# Altium PCB ControlUnit.PcbDoc (part 2 of 2)
Units mm, origin at the board's own origin, x right, y up, seen from the top; angles counter-clockwise.
Board outline 168.75 x 59.75 mm, 4 copper layers (Top Layer, GND, VCC, Bottom Layer), stack 1.536 mm thick; 143 components, 128 nets, 538 pads, 141 vias.
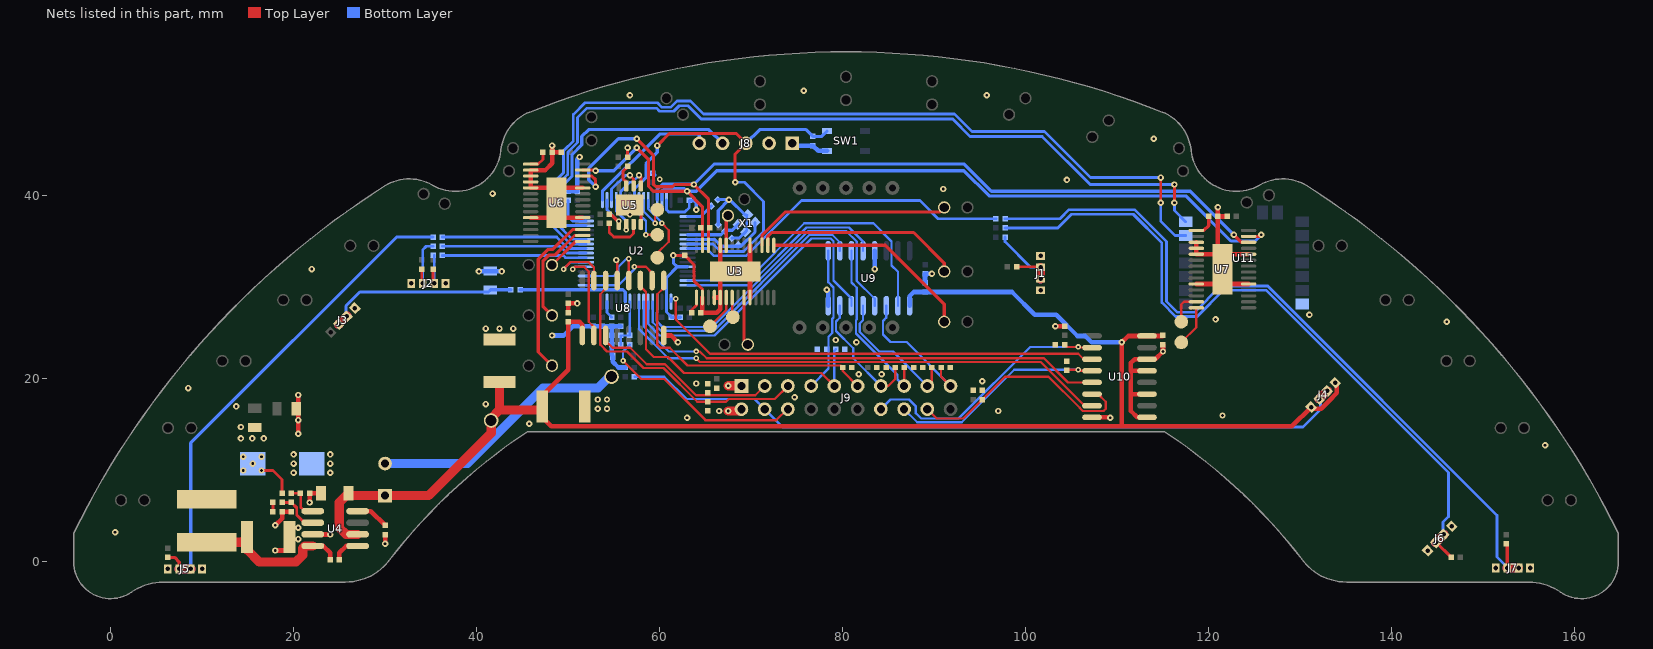
[diagram p4: the nets of this part, all layers, seen from the top]

## Via types
v1: diameter 0.7, hole 0.3, Top Layer to Bottom Layer, tented both sides, 122 vias
v2: diameter 0.6, hole 0.25, Top Layer to Bottom Layer, tented both sides, 18 vias
v3: diameter 0.7, hole 0.3, Top Layer to Bottom Layer, tented bottom, 1 vias

## Nets (pads, with @x,y where several pads share a name; then routed paths per layer and width w, separated by ;. In a path a pad name is that pad's centre, name@x,y a point inside that pad or via, vN(x,y) a via of type N, cw(c..) or ccw(c..) an arc to the next point about the centre after c; other vN are vias at no path point) (continued)
GND: C1.2 C2.2 C4.2 C6.2 C7.1 C8.2 C9.1 C10.1 C11.1 C12.1 C13.2 C14.2 C15.2 C16.2 C17.2 C18.2 C19.2 C20.2 C21.2 C22.2 C23.2 C24.2 C25.2 C26.1 C27.2 C28.1 C29.2 C30.2 C31.1 C32.2 D9.1 D10.1 D34.1 J1.1 J1.4 J2.1 J2.4 J3.1 J5.1 J5.4 J6.1 J6.4 J7.1 J7.4 J8.1 J9.2 R4.1 R5.2 R8.1 R10.2 R11.2 R13.1 R19.1 R20.1 R30.2 R31.1 R32.1 R33.1 R34.1 R35.1 R36.1 R37.1 R38.1 R39.1 R40.1 R41.1 R42.1 R43.1 R44.1 R45.1 SW1.4 U2.12 U2.18 U2.63 U3.2 U3.4 U3.5 U3.10 U3.19 U3.24 U4.7 U5.4 U5.9 U6.2 U6.3 U6.4 U6.5 U6.10 U6.19 U6.24 U7.3 U7.4 U7.5 U7.10 U7.19 U7.24 U8.8 U8.13 U9.8 U9.13 U10.8 U10.9 U10.11 U10.13 U10.14 U11.7 X1.2 X1.4 | length 204
  Top Layer w0.3: U8.13@55.365,30.75 v1@55.365,32.885
  Top Layer w0.35: v1(55.25,33) v1@55.365,32.885 ; C14.2@56.5,44.25 v1(56.5,45.25) ; U5.9@56.75,39 57.75,39 57.95,38.8 U5.4@57.95,36.9 ; v1(61.5,33.5) C2.2@62.75,33.5 63.75,32.5 63.75,30.75 64.675,29.825 U3.2@64.675,28.9
  Top Layer w0.5: v1(18,1.25) 19.25,1.25 19.57,1.57 D9.1@19.57,2.07 ; v1(18,4) 18.75,4.75 R11.2@18.75,5.5 C6.2@19.75,5.5 ; v1(20.5,14) v1(20.5,15.5) v1(20.5,18.25) ; v1(21.75,6.5) R13.1@21.75,7.5 C7.1@23,7.5 ; U4.7@22.12,3 v1(24,3) ; v1(30,2) C8.2@30,3 ; U6.10@45.9,37.625 U6.10@48.875,37.625 ; v1(48.25,45.5) R19.1@48.25,44.75 ; U6.10@49,40.875 U6.5@45.9,40.875 U6.4@45.9,41.525 U6.3@45.9,42.175 U6.2@45.9,42.825 47.525,42.825 48.25,43.55 R19.1@48.25,44.75 ; C23.2@49.25,44.75 R19.1@48.25,44.75 ; C26.1@50,27.25 C27.2@50,28.25 v1(51,28.25) ; U6.19@51.6,37.625 U6.10@48.875,37.625 ; U6.24@51.6,40.875 48.75,40.875 U6.10@48.75,39.25 48.75,37.75 U6.10@48.875,37.625 ; U8.8@60.445,24.75 61.25,24.75 v1(62,24) ; U3.2@64.675,28.9 64.675,27.425 R8.1@64.5,27.25 66.25,27.25 66.625,27.625 U3.5@66.625,28.9 ; U3.4@65.975,28.9 U3.5@66.625,28.9 ; U3.10@66.25,31.75 U3.10@66.75,31.75 ; U3.10@66.475,30.9 U3.10@66.625,31.05 ; U3.10@66.625,31.625 U3.10@66.625,31.05 ; U3.24@66.625,34.6 66.625,31.875 U3.10@66.75,31.75 ; U3.10@69.875,28.9 U3.10@69.875,31.75 ; U3.19@69.875,34.6 U3.10@69.875,31.75 ; v1(103.25,25.75) C31.1@104.25,25.75 ; U10.8@107.25,15.805 109.195,15.805 v1(109.25,15.75) ; 111.595,18.345 U10.11@113.25,18.345 ; 111.635,20.885 U10.13@113.25,20.885 ; U10.9@113.25,15.805 112.195,15.805 111.5,16.5 111.5,21.75 111.905,22.155 U10.14@113.25,22.155 114.155,22.155 v1(115,23) C32.2@115,23.75 ; U7.10@118.65,30.375 121.5,30.375 U7.10@121.5,30.75 ; U7.3@118.65,34.925 U7.4@118.65,34.275 U7.5@118.65,33.625 U7.10@121,33.625 ; v1(121,38.75) R20.1@121,37.75 ; C24.2@122,37.75 R20.1@121,37.75 ; U7.19@124.35,30.375 121.875,30.375 U7.10@121.5,30.75 ; U7.24@124.35,33.625 U7.10@121.5,33.625 ; U3.5@66.625,28.9 U3.10@66.625,31.05 ; U3.10@66.625,31.05 U3.10@67.325,31.75 ; U3.10@66.75,31.75 U3.10@67.325,31.75 ; U3.10@67.325,31.75 U3.10@68.25,31.75 U3.10@69.875,31.75 ; U7.10@121,33.625 R20.1@121,37.75 ; U7.10@121,33.625 U7.10@121.5,33.625 ; U7.10@121.5,30.75 U7.10@121.5,32 U7.10@121.5,33.625
  Top Layer w1: v1(67.5,16.5) 68.741,16.5 J9.2@68.935,16.694
  Bottom Layer w0.25: X1.4@69.394,36.081 69.508,36.195 69.508,37.919 X1.2@69.606,37.919
  Bottom Layer w0.3: U2.63@60.75,39.55 60.75,38.5 61,38.25 62.75,38.25 63.25,38.75 C18.2@63.25,39.476
  Bottom Layer w0.35: R10.2@59.25,42.5 R10.2@59.5,42.25 ; v1(61.5,33.5) 61.5,32.671 61.921,32.25 ; C21.2@62.25,26.75 C17.2@61.25,26.75 61.25,26.81 60.75,27.31 U2.18@60.75,28.45 60.75,31.079 61.921,32.25 ; U2.12@63.05,32.25 61.921,32.25 ; C18.2@63.25,39.476 63.774,39.476 64,39.25 v1(64,38.5) ; C22.2@66.354,39.604 67.546,39.604 v1(67.575,39.575) ; C11.1@66.396,36.854 66.396,38.396 v1(67.575,39.575) ; C12.1@67.896,35.354 67.896,35.396 68.709,35.396 X1.4@69.394,36.081 ; X1.2@69.508,37.919 69.331,37.919 67.675,39.575 v1(67.575,39.575)
  Bottom Layer w0.5: v1(40.25,31.75) v1(42.75,31.75) ; v1(48.25,24.75) 49.5,24.75 50.5,25.75 C16.2@52.75,25.75 C20.2@53.75,25.75 C10.1@54.75,25.75 ; C9.1@50,40.5 C19.2@51,40.5 51,44 v1(51.25,44.25) ; D34.1@54.75,22.64 R30.2@54.75,23.75 C30.2@54.75,24.75 C10.1@54.75,25.75 ; D34.1@54.89,22.5 54.89,21.86 55.5,21.25 R4.1@56.25,21.25 ; R5.2@55.75,25.75 C10.1@54.75,25.75 ; J8.1@74.5,45.75 74.75,45.5 C13.2@76.75,45.5 77.325,44.925 SW1.4@78.29,44.925 ; v1(78.25,29.75) 78.42,29.58 U9.8@78.42,28 ; v1(83.5,32) U9.13@83.5,34 ; C28.1@89,30.5 C29.2@89,31.5 v1(89.75,31.5)
  Bottom Layer w1: C15.2@30,10.75 39,10.75 47.25,19 53.25,19 D10.1@54.5,20.25
  other v1: 20.5,2.5 0.5,3.25 20.5,3.75 20,9.75 24,9.75 20,10.75 24,10.75 20,11.75 24,11.75 156.75,12.75 45.75,15.097 63,15.75 121.5,16 66.5,16.5 13.75,17 41,17.25 74.75,18 8.5,19 64,19.5 95.25,19.75 81.75,20.504 84.25,20.504 81.5,24 79.25,24.25 146,26.25 120.75,26.5 131,27 22,32 56.75,37.975 41.75,40.25 91,40.75 104.5,41.75 114,46.25 56.75,51 95.75,51 75.75,51.5
  other v2: 60,41.825
  other v3: 97,16.5
Huile: J9.9 R40.2 U8.11 | length 34.1
  Top Layer w0.25: U8.11@57.905,30.75 57.905,30.095 58.5,29.5 58.5,23.25 59.35,22.4 60.916,22.4 62.656,20.659 77.67,20.659 J9.9@79.095,19.234
  Bottom Layer w0.25: J9.9@79.095,19.234 79.095,23.095 R40.2@79.25,23.25
Huile_in: U2.35 U8.12 | length 8.1
  Top Layer w0.25: U8.12@56.635,30.75 v2(56.635,33.133)
  Bottom Layer w0.25: U2.35@51.95,31.25 55,31.25 55.475,31.725 55.475,32.238 56.37,33.133 v2(56.635,33.133)
I2C_SCL: R14.2 U2.61 U3.26 U6.26 U7.26 | length 99.4
  Top Layer w0.35: U6.26@51.6,42.175 52.575,42.175 53,41.75 v1(53,41) ; v1(57.5,46.25) 59.325,44.425 59.325,41.275 59.6,41 61.4,41 61.65,41.25 v1(63.75,41.25) 65.325,39.675 65.325,36.5 U3.26@65.325,34.6 ; v1(122.75,35.75) 123.575,34.925 U7.26@124.35,34.925
  Bottom Layer w0.35: v1(53,41) 52.25,41.75 52.25,43 55.5,46.25 v1(57.5,46.25) ; U2.61@59.75,39.55 59.75,40.707 60.343,41.3 63.7,41.3 v1(63.75,41.25) 66,43.5 93.25,43.5 96.25,40.5 118,40.5 v1(122.75,35.75)
I2C_SDA: R16.2 U2.62 U3.27 U6.27 U7.27 | length 95.3
  Top Layer w0.35: U6.27@51.6,42.825 52.925,42.825 v1(53,42.75) ; v1(57.5,45.25) 58.8,43.95 58.8,41.025 59.325,40.5 v1(63,40.5) 64.675,38.825 64.675,36.5 U3.27@64.675,34.6 ; U7.27@124.35,35.575 125.575,35.575 v1(125.75,35.75)
  Bottom Layer w0.35: v1(53,42.75) 55,42.75 v1(57.5,45.25) ; U2.62@60.25,39.55 60.25,40.5 60.55,40.8 62.7,40.8 v1(63,40.5) 64,40.5 66.25,42.75 93.25,42.75 96,40 117.5,40 122.425,35.075 125.075,35.075 v1(125.75,35.75)
JVCC: D33.1 J8.2
  other v1: 41,25.5 42.5,25.5 44,25.5
LED_MODE1: D6.2 U6.17 | length 18.4
  Top Layer w0.35: D6.2@48.242,21.448 46.742,22.948 46.742,33.069 47.823,34.15 48.325,34.15 50.5,36.325 U6.17@51.6,36.325
LED_MODE2: D4.2 U6.16 | length 11.9
  Top Layer w0.35: D4.2@48.242,26.948 47.242,27.948 47.242,32.862 47.93,33.55 48.575,33.55 50.7,35.675 U6.16@51.6,35.675
LED_MODE3: D1.2 U6.15 | length 4.4
  Top Layer w0.35: D1.2@48.242,32.448 50.819,35.025 U6.15@51.6,35.025
LED_N: D7.2 U3.9 | length 5.3
  Top Layer w0.35: U3.9@69.225,28.9 69.225,24.154 D7.2@69.635,23.744
LED_OIL: D2.2 U3.23 | length 3.3
  Top Layer w0.35: U3.23@67.275,34.6 67.275,37.655 D2.2@67.467,37.846
LED_TEMP1: D8.2 U3.15 | length 23.2
  Top Layer w0.35: U3.15@72.475,34.6 84.65,34.6 91.095,28.155 D8.2@91.095,26.244
LED_TEMP2: D5.2 U3.16 | length 22.7
  Top Layer w0.35: U3.16@71.825,34.6 71.825,35.575 72.25,36 87.75,36 91.095,32.655 D5.2@91.095,31.744
LED_TEMP3: D3.2 U3.17 | length 22.3
  Top Layer w0.35: U3.17@71.175,34.6 71.175,35.675 73.75,38.25 90.6,38.25 D3.2@91.095,38.744
MEM_C\E\: R15.2 U2.50 U5.1 | length 4.6
  Top Layer w0.35: R15.2@54.5,38 54.64,38 55.415,37.225 v2(55.525,37.225) 55.525,36.975 55.575,36.925 U5.1@55.55,36.9
  Bottom Layer w0.3: U2.50@54.25,39.55 54.25,38.5 v2(55.525,37.225)
MEM_CLK: U2.51 U5.6 | length 5.1
  Top Layer w0.35: v1(56.75,42.25) 57.15,41.85 U5.6@57.15,41.1
  Bottom Layer w0.3: U2.51@54.75,39.55 54.75,40.75 56.25,42.25 v1(56.75,42.25)
MEM_MISO: U2.52 U5.2 | length 3.7
  Bottom Layer w0.3: U2.52@55.25,39.55 55.25,38.349 56.35,37.249 v2(56.35,36.275)
MEM_MOSI: U2.53 U5.5 | length 4.9
  Top Layer w0.35: v1(57.75,42.25) 57.95,42.05 U5.5@57.95,41.1
  Bottom Layer w0.3: U2.53@55.75,39.55 55.75,40.5 56.75,41.5 57,41.5 v1(57.75,42.25)
MODED0: R23.2 U2.39 | length 15.8
  Bottom Layer w0.3: R23.2@36.25,33.5 49.475,33.5 49.725,33.25 U2.39@51.95,33.25
MODED1: R24.2 U2.40 | length 16
  Bottom Layer w0.3: R24.2@36.25,34.5 49.111,34.5 49.861,33.75 U2.40@51.95,33.75
MOT+: J9.16 R33.2 U10.4 | length 24.8
  Top Layer w0.25: R33.2@104.5,20.948 104.552,21 v2(105.75,21) 105.865,20.885 U10.4@107.25,20.885
  Bottom Layer w0.25: J9.16@86.715,16.694 88.14,15.269 93.019,15.269 98.75,21 v2(105.75,21)
Mot+_out: U2.23 U10.5 | length 54.2
  Top Layer w0.25: v2(64,23) 64.397,23 65.137,22.259 101.991,22.259 104.635,19.615 U10.5@107.25,19.615
  Bottom Layer w0.25: U2.23@58.25,28.45 58.25,25.75 61,23 v2(64,23)
MOT-: J9.14 R34.2 U10.2 | length 29.7
  Top Layer w0.25: R34.2@104.25,23.75 104.5,23.5 v2(105.75,23.5) 105.825,23.425 U10.2@107.25,23.425
  Bottom Layer w0.25: J9.14@84.175,16.694 85.231,17.75 87.25,17.75 88,17 88,16.25 88.581,15.669 92.669,15.669 100.5,23.5 v2(105.75,23.5)
Mot-_out: U2.17 U10.3 | length 50.3
  Top Layer w0.25: v2(61.75,28.75) 61.75,26.5 65.5,22.75 105.75,22.75 106.345,22.155 U10.3@107.25,22.155
  Bottom Layer w0.3: U2.17@61.25,28.45 61.25,28.75 v2(61.75,28.75)
NetC1_1: C1.1 J3.2 J3.3 R22.2 | length 22.3
  Top Layer w1: J3.3@24.942,25.977 J3.2@25.826,26.861
  Bottom Layer w0.35: J3.2@25.826,26.861 25.731,26.956 25.731,27.981 27.25,29.5 41.3,29.5 C1.1@41.5,29.7 ; C1.1@41.55,29.75 R22.2@43.75,29.75
  Bottom Layer w1: J3.3@24.942,25.977 J3.2@25.826,26.861
NetC3_1: C3.1 D9.2 L1.1 U4.8 | length 18
  Top Layer w0.5: U4.8@22.1,1.75 23.25,1.75 24,1 C3.1@24,0.25
  Top Layer w1: L1.1@10.5,2.15 14.33,2.15 D9.2@14.93,2.75 14.93,1.32 16.25,0 20.25,0 21,0.75 21,1.5 21.25,1.75 U4.8@22.1,1.75
NetC3_2: C3.2 U4.1 | length 3.1
  Top Layer w0.5: C3.2@25,0.25 25,1 25.75,1.75 U4.1@27,1.75
NetC4_1: C4.1 L1.2 L2.1 R12.2 | length 4.2
  Top Layer w0.3: v1(16.5,10) 17.75,10 18.75,9 R12.2@18.75,7.5
  other v1: 14.5,10 15.53,10.75 14.5,11.5 16.5,11.5 14.25,13.5 15.5,13.5 16.75,13.5 14.25,14.75
NetC5_1: C5.1 C6.1 U4.6 | length 4.7
  Top Layer w0.3: C5.1@18.75,6.5 C6.1@19.75,6.5 19.774,6.5 20.35,5.924 20.35,5.15 21.21,4.29 U4.6@22.1,4.29
NetC5_2: C5.2 R11.1 | length 1
  Top Layer w0.3: R11.1@17.75,5.5 C5.2@17.75,6.5
NetC8_1: C8.1 U4.4 | length 3.6
  Top Layer w0.5: U4.4@27,5.56 28.44,5.56 C8.1@30,4
NetC9_2: C9.2 U2.47 | length 3.9
  Bottom Layer w0.3: C9.2@50,39.5 50,37.75 50.5,37.25 U2.47@51.95,37.25
NetC10_2: C10.2 U2.31 | length 1.9
  Bottom Layer w0.3: U2.31@54.25,28.45 54.25,27.274 54.75,26.774 C10.2@54.75,26.75
NetD32_1: D32.1 J9.1 | length 1.4
  Top Layer w1: v1(67.5,19.25) J9.1@68.919,19.25
  other v1: 53.25,16.75 54.25,16.75 53.25,17.75 54.25,17.75
NetJ1_2: J1.2 J1.3 R1.1 R25.1 | length 10.8
  Top Layer w0.3: R1.1@99,32.25 J1.2@101.579,32.25
  Top Layer w1: J1.3@101.635,30.944 J1.2@101.635,32.194
  Bottom Layer w0.3: R25.1@97.75,35.5 97.75,35 100.556,32.194 J1.2@101.635,32.194
  Bottom Layer w0.35: J1.3@101.635,30.769 J1.3@101.635,30.944
  Bottom Layer w1: J1.3@101.635,30.944 J1.2@101.635,32.194
NetJ2_2: J2.2 R2.1 R23.1 | length 4.7
  Top Layer w0.3: R2.1@35.25,32 35.25,30.554 J2.2@35.36,30.444
  Bottom Layer w0.3: J2.2@35.36,30.444 R23.1@35.36,33.5
NetJ2_3: J2.3 R3.1 R24.1 | length 6.6
  Top Layer w0.3: R3.1@34,32 34,30.554 J2.3@34.11,30.444
  Bottom Layer w0.3: J2.3@34.11,30.444 34.11,34.11 34.5,34.5 R24.1@35.25,34.5
NetJ5_2: J5.2 J5.3 R6.2 R21.1 | length 54.3
  Top Layer w0.35: R6.2@6.25,0.5 7,0.5 7.51,-0.01 J5.3@7.51,-0.756
  Top Layer w1: J5.3@7.51,-0.756 J5.2@8.76,-0.756
  Bottom Layer w0.35: J5.2@8.76,-0.756 8.76,13.01 31.25,35.5 R21.1@35.25,35.5
  Bottom Layer w1: J5.3@7.51,-0.756 J5.2@8.76,-0.756
NetJ6_2: J6.2 J6.3 R7.1 R27.1 | length 78.9
  Top Layer w0.35: J6.2@144.794,2.128 144.872,2.128 R7.1@146.5,0.5
  Top Layer w1: J6.2@144.794,2.128 J6.3@145.678,3.012
  Bottom Layer w0.3: R27.1@97.75,36.5 103.5,36.5 105,38 111.75,38 114.875,34.875 114.875,28.339 116.389,26.825 118.75,26.825 121.625,29.7 126.264,29.7 146.2,9.764 146.2,4.95 145.608,4.358 145.608,3.082 J6.3@145.678,3.012
  Bottom Layer w1: J6.2@144.794,2.128 J6.3@145.678,3.012
NetJ7_2: J7.2 J7.3 R9.1 R28.1 | length 85.6
  Top Layer w0.35: R9.1@152.5,2 152.61,1.89 J7.3@152.61,-0.656
  Top Layer w1: J7.3@152.61,-0.656 J7.2@153.86,-0.656
  Bottom Layer w0.3: R28.1@97.75,37.5 103.75,37.5 104.75,38.5 111.886,38.5 115.375,35.011 115.375,28.475 116.575,27.275 118.425,27.275 121.3,30.15 126.45,30.15 151.5,5.1 151.5,0.554 152.61,-0.556 J7.3@152.61,-0.656
  Bottom Layer w1: J7.3@152.61,-0.656 J7.2@153.86,-0.656
NetR8_2: R8.2 U3.1 | length 1.9
  Top Layer w0.3: R8.2@63.5,27.25 63.5,27.528 64.025,28.053 U3.1@64.025,28.9
NetR12_1: R12.1 R13.2 U4.5 | length 4
  Top Layer w0.3: R12.1@19.75,7.5 R13.2@20.75,7.5 20.8,7.45 20.8,5.95 21.19,5.56 U4.5@22.1,5.56
NetR17_2: R17.2 U5.7 | length 2.5
  Top Layer w0.35: U5.7@56.35,41.1 56.35,41.536 56,41.886 56,42.69 56.5,43.19 R17.2@56.5,43.25
NetR18_2: R18.2 U5.3 | length 5
  Top Layer w0.3: R18.2@54.5,37 54.5,36 55,35.5 56.75,35.5 57.15,35.9 U5.3@57.15,36.9
NetR19_2: R19.2 U6.1 | length 2.3
  Top Layer w0.3: U6.1@45.9,43.475 46.725,43.475 47.25,44 R19.2@47.25,44.75
NetR20_2: R20.2 U7.1 | length 2.6
  Top Layer w0.35: U7.1@118.65,36.225 119.475,36.225 120,36.75 R20.2@120,37.75
NetTP1_1: TP1.1 U2.57 | length 5.4
  Top Layer w0.25: v2(58.5,35.75) TP1.1@59.75,35.75
  Bottom Layer w0.25: U2.57@57.75,39.55 57.75,38 58.5,37.25 v2(58.5,35.75)
NetTP2_1: TP2.1 U2.58 | length 4.7
  Top Layer w0.25: v2(59.5,37) 59.5,38.25 TP2.1@59.75,38.5
  Bottom Layer w0.25: U2.58@58.25,39.55 58.25,38.313 59.5,37.063 v2(59.5,37)
NetTP3_1: TP3.1 U2.59 | length 7.7
  Top Layer w0.25: TP3.1@59.75,33.25 59.75,33.75 61,35 61,36.25 v2(60.25,37)
  Bottom Layer w0.25: U2.59@58.75,39.55 58.75,38.563 60.25,37.063 v2(60.25,37)
NetTP4_1: TP4.1 U3.6 | length 3.9
  Top Layer w0.25: TP4.1@65.5,25.75 67.275,27.525 U3.6@67.275,28.9
NetTP5_1: TP5.1 U3.7 | length 2.2
  Top Layer w0.25: U3.7@67.925,28.9 67.925,26.825 TP5.1@68,26.75
NetTP6_1: TP6.1 U7.13 | length 3.6
  Top Layer w0.25: TP6.1@117,26.25 117,28.122 117.303,28.425 U7.13@118.65,28.425
NetTP7_1: TP7.1 U7.14 | length 4.5
  Top Layer w0.25: TP7.1@117,24 118.65,25.65 U7.14@118.65,27.775
NEUTRE: J9.3 R37.2 U8.3 | length 20.9
  Top Layer w0.25: U8.3@54.095,24.75 54.095,24.155 54.85,23.4 56.784,23.4 58.584,21.6 60.584,21.6 63.975,18.209 65.25,18.209 70.45,18.209 J9.3@71.475,19.234
Neutre_in: U2.37 U8.2 | length 11
  Top Layer w0.25: v2@50.45,32.1 50.475,32.125 50.5,32.1 v2(50.5,32) 50.75,32.25 51.75,32.25 52.25,31.75 52.25,26.25 52.825,25.675 U8.2@52.825,24.75
  Bottom Layer w0.25: v2(50.5,32) 50.75,32.25 U2.37@51.95,32.25
OSC_IN: C11.2 U2.5 X1.1 | length 6
  Bottom Layer w0.35: U2.5@63.05,35.75 66.707,35.75 C11.2@67.104,36.146 67.207,36.25 67.937,36.25 X1.1@68.581,36.894
OSC_OUT: C12.2 U2.6 X1.3 | length 9.4
  Bottom Layer w0.35: U2.6@63.05,35.25 66,35.25 66.75,34.5 68.604,34.5 68.874,34.5 70.419,36.045 X1.3@70.419,37.106
PAL_d: R28.2 U2.8 | length 37.3
  Bottom Layer w0.3: U2.8@63.05,34.25 65.126,34.25 65.904,33.472 69.472,33.472 75.5,39.5 88.436,39.5 90.436,37.5 R28.2@96.75,37.5
PAL_g: R21.2 U2.41 | length 16.2
  Bottom Layer w0.3: R21.2@36.25,35.5 48.748,35.5 49.998,34.25 U2.41@51.95,34.25
Rapport+: J9.17 R44.2 U9.5 | length 15.1
  Top Layer w0.25: J9.17@89.255,19.234 89.75,19.729 R44.2@89.75,21.25
  Bottom Layer w0.25: U9.5@82.23,28 82.23,26.416 81.868,26.054 81.868,25.132 84,23 85.489,23 J9.17@89.255,19.234
Rapport+_in: U2.20 U9.4 | length 36.9
  Bottom Layer w0.25: U2.20@59.75,28.45 59.75,27.3 59.675,27.225 59.675,26.325 60.325,25.675 65.741,25.675 76.216,36.15 78.7,36.15 80.4,36.15 81.535,35.015 81.535,32.987 81.524,32.976 81.524,30.726 83.5,28.75 U9.4@83.5,28
Rapport-: J9.19 R45.2 U9.3 | length 15.5
  Top Layer w0.25: R45.2@90.75,21.25 90.75,20.279 J9.19@91.795,19.234
  Bottom Layer w0.25: U9.3@84.77,28 84.77,26.701 84.408,26.339 84.408,24.842 85.22,24.029 87,24.029 J9.19@91.795,19.234
Rapport-_in: U2.15 U9.2 | length 33
  Bottom Layer w0.25: U2.15@63.05,30.75 69.566,30.75 75.816,37 83.358,37 85.345,35.013 85.345,32.405 86.04,31.71 U9.2@86.04,28
Regime: J9.5 R38.2 U8.14 | length 31.1
  Top Layer w0.25: U8.14@54.095,30.75 54.095,29.845 53.5,29.25 53.5,23.75 54.25,23 56.434,23 58.234,21.2 60.419,21.2 64.119,17.5 R38.2@65.25,17.5 67.25,17.5 67.559,17.809 72.59,17.809 J9.5@74.015,19.234
Regime_in: U2.38 U8.15 | length 8.1
  Top Layer w0.25: v2(49.5,32) 50.275,32.775 52.225,32.775 52.825,32.175 U8.15@52.825,30.75
  Bottom Layer w0.25: v2(49.5,32) 50.25,32.75 U2.38@51.95,32.75
RESERVED1: J9.7 R39.2 U9.9 | length 16.3
  Bottom Layer w0.25: J9.7@76.388,19.402 J9.7@76.555,19.234 78.45,21.129 78.45,23.25 78.45,24.604 78.862,25.016 78.862,26.562 79,26.7 79,30 78.42,30.58 U9.9@78.42,34
Reserved1_in: U2.21 U9.10 | length 28.7
  Bottom Layer w0.25: U2.21@59.25,28.45 59.25,26.184 60.184,25.25 65.881,25.25 76.381,35.75 78.866,35.75 79.69,34.926 U9.10@79.69,34
RESERVED2: J9.13 R42.2 U9.7 | length 14.1
  Top Layer w0.25: J9.13@84.175,19.234 84.984,19.234 85.75,20 R42.2@85.75,21.25
  Bottom Layer w0.25: U9.7@79.69,28 79.69,26.69 79.262,26.262 79.262,25.238 81.153,23.347 81.153,22.256 J9.13@84.175,19.234
Reserved2_in: U2.22 U9.6 | length 35.6
  Bottom Layer w0.25: U2.22@58.75,28.45 58.75,26 60,24.75 66,24.75 76.6,35.35 78.7,35.35 79,35.05 79,30.75 80.96,28.79 U9.6@80.96,28
RESERVED3: J9.15 R43.2 U9.11 | length 19.2
  Top Layer w0.25: J9.15@86.715,19.234 R43.2@86.715,21.25
  Bottom Layer w0.25: U9.11@80.96,34 80.96,30.54 81.535,29.965 81.535,26.485 81.468,26.418 81.468,24.966 86,20.434 86,19.949 J9.15@86.715,19.234
Reserved3_in: U2.16 U9.12 | length 23.4
  Bottom Layer w0.25: U2.16@63.05,30.25 69.75,30.25 76.05,36.55 78.534,36.55 80.7,36.55 82.23,35.02 U9.12@82.23,34
Shifter: J9.11 R41.2 U8.9 | length 31.3
  Top Layer w0.25: U8.9@60.445,30.75 60.445,29.945 59.75,29.25 59.75,23.75 60.1,23.4 61.1,23.4 63.041,21.459 79.791,21.459 R41.2@80,21.25 80,20.869 J9.11@81.635,19.234
Shifter_in: U2.33 U8.10 | length 9.3
  Top Layer w0.25: v2(57.25,32.25) 58.5,32.25 59.175,31.575 U8.10@59.175,30.75
  Bottom Layer w0.25: U2.33@51.95,30.25 55.5,30.25 57.25,32 v2(57.25,32.25)
START: J4.2 J4.3 J9.4 R26.2 | length 82
  Top Layer w0.3: J4.2@132.069,17.803 J4.2@132.197,17.803
  Top Layer w1: J4.2@132.069,17.803 J4.3@132.953,18.687
  Bottom Layer w0.25: R26.2@57.25,20.25 60.5,20.25 62.941,17.809 70.36,17.809 J9.4@71.475,16.694
  Bottom Layer w0.3: J9.4@71.475,16.694 73.419,14.75 130.289,14.75 132.222,16.683 J4.2@132.222,17.651 ; J4.2@132.017,17.856 J4.2@132.069,17.803 ; J4.3@132.901,18.687 J4.3@132.953,18.687
  Bottom Layer w0.5: J4.2@132.069,17.803 J4.2@132.222,17.651
  Bottom Layer w1: J4.2@132.069,17.803 J4.3@132.953,18.687
STOP: J9.18 R32.2 U10.6 | length 26.1
  Top Layer w0.25: J9.18@89.255,16.694 90.28,15.669 93.169,15.669 R32.2@95.25,17.75 97.75,20.25 102.5,20.25 105.9,16.85 105.9,16.837 106.237,16.5 108.5,16.5 108.75,16.75 108.75,17.5 107.905,18.345 U10.6@107.25,18.345
Stop_out: U2.24 U10.7 | length 56
  Top Layer w0.25: v2(64,22.25) 64.391,21.859 101.641,21.859 106.425,17.075 U10.7@107.25,17.075
  Bottom Layer w0.25: U2.24@57.75,28.45 57.75,25.45 60.95,22.25 v2(64,22.25)
TCK-SWCLK: J8.5 U2.49 | length 15.1
  Bottom Layer w0.25: J8.5@64.34,45.75 J8.5@64.34,45.769
  Bottom Layer w0.35: U2.49@53.75,39.55 53.75,40.5 60,46.75 64.34,46.75 J8.5@64.34,45.769
TEMP: J9.6 R29.1 | length 23.3
  Top Layer w0.25: v2(56,22) 58,20 60.5,20 65,15.5 72.75,15.5 73.944,16.694 J9.6@74.015,16.694
  Bottom Layer w0.25: v2(56,22) 56,23 R29.1@56.75,23.75
Temp_in: C30.1 R29.2 R30.1 U2.26 | length 5.7
  Bottom Layer w0.25: R30.1@55.75,23.75 C30.1@55.75,24.75 R29.2@56.75,24.75 U2.26@56.75,28.45
TMS-SWDIO: J8.4 U2.46 | length 29.4
  Bottom Layer w0.35: U2.46@51.95,36.75 49.75,36.75 49.25,37.25 49.25,40.975 50.425,42.15 50.425,44.5 51.5,45.575 51.5,46.5 52.25,47.25 65.38,47.25 J8.4@66.88,45.75
TRST: C13.1 J8.3 SW1.2 U2.7 U2.56 | length 49.2
  Top Layer w0.35: v1(59.75,45.5) 61.075,46.825 68.345,46.825 J8.3@69.42,45.75 68.25,44.58 v1(68.25,41.5)
  Bottom Layer w0.3: U2.7@63.05,34.75 65.828,34.75 66.656,33.922 69.172,33.922 71.356,36.106 71.356,39.394 69.25,41.5 v1(68.25,41.5)
  Bottom Layer w0.35: U2.56@57.25,39.55 57.25,40.75 58.5,42 58.5,43.5 59.75,44.75 v1(59.75,45.5) ; J8.3@69.42,45.75 70.92,47.25 76,47.25 C13.1@76.75,46.5 77.715,46.5 SW1.2@78.29,47.075
USART1_RX: U2.43 U11.14 | length 90.7
  Top Layer w0.3: v1(116.25,39.25) v1(116.25,41.25)
  Bottom Layer w0.3: U2.43@51.95,35.25 50.475,35.25 48.6,37.125 48.6,40.975 48.775,41.15 48.775,41.172 49.95,42.347 49.95,44.697 49.975,44.722 49.975,44.775 51.025,45.825 51.025,48.55 52.059,49.584 59.641,49.584 59.975,49.25 61.542,49.25 62.147,49.855 63.095,49.855 64.55,48.4 92.025,48.4 93.925,46.5 101.8,46.5 107.05,41.25 v1(116.25,41.25) ; v1(116.25,39.25) 116.25,38.405 U11.14@117.48,37.175
USART1_TX: U2.42 U11.13 | length 94.5
  Top Layer w0.3: v1(114.75,39.25) v1(114.75,42)
  Bottom Layer w0.3: U2.42@51.95,34.75 50.275,34.75 48.15,36.875 48.15,41.183 49.5,42.533 49.5,44.936 50.575,46.011 50.575,48.9 51.85,50.175 59.75,50.175 60.224,49.701 61.226,49.701 61.9,50.375 63.375,50.375 64.8,48.95 92.225,48.95 94.15,47.025 102.05,47.025 107.075,42 v1(114.75,42) ; v1(114.75,39.25) 114.75,37.25 116.325,35.675 U11.13@117.48,35.675
V_reg: R22.1 U2.27 | length 12.7
  Bottom Layer w0.35: R22.1@44.75,29.75 56,29.75 56.25,29.5 U2.27@56.25,28.45
VBAT: C22.1 U2.1 | length 3.1
  Bottom Layer w0.35: U2.1@63.05,37.75 64.5,37.75 C22.1@65.646,38.896
VIN: C7.2 C15.1 C26.2 C28.2 C32.1 D10.2 D32.2 D33.2 J4.1 J4.4 U4.2 U8.1 U9.1 U10.16 | length 181
  Top Layer w0.5: U8.1@51.555,24.75 51.555,25.945 51.25,26.25 C26.2@50,26.25 50,21 47.18,18.18 D32.2@47.18,17 47.18,15.795 48.15,14.825 110.5,14.825 ; C32.1@114.945,24.695 U10.16@113.25,24.695 111.195,24.695 v1(110.5,24) 110.5,14.825 ; J4.4@133.837,19.571 134.007,19.401 134.007,18.468 133.172,17.633 132.288,16.749 131.356,16.749 J4.1@131.185,16.919 129.091,14.825 110.5,14.825
  Top Layer w1: U4.2@27,3.02 25.73,3.02 25,3.75 25,6.5 C7.2@26,7.5 26.25,7.25 C15.1@30,7.25 34.75,7.25 41.594,14.094 D10.2@41.594,15.462 41.594,15.712 42.5,16.617 ; D33.2@42.5,19.68 42.5,16.617 ; D32.2@47.18,17 46.797,16.617 42.5,16.617
  Bottom Layer w0.5: U9.1@87.31,28 87.31,29.06 87.75,29.5 C28.2@89,29.5 98.5,29.5 101,27 103.35,27 105.655,24.695 106.5,24.695 107.195,24 v1(110.5,24)
pads on no net: J9.8 SW1.1 SW1.3 U2.2 U2.3 U2.4 U2.14 U2.29 U2.30 U2.44 U2.45 U2.54 U2.55 U3.8 U4.3 U6.18 U6.20 U7.11 U7.12 U7.22 U7.23 U10.10 U10.12 U10.15 U11.1 U11.2 U11.3 U11.4 U11.5 U11.6 U11.9 U11.10 U11.11 U11.12 U11.15 U11.16

## Polygon pours and split planes (outlines as drawn)
3V3 on Top Layer "NO_THERM_PLANE" (solid, remove dead copper, pour order 2): 19.5,15.25 19.5,22 17.75,22 14.5,18.75 14.5,16 16.25,16 17,15.25
NetD32_1 on Top Layer "NO_THERM_PLANE" (solid, remove dead copper, pour order 12): 51,15.25 53.5,15.25 54.75,16.5 54.75,18.75 51,18.75
NetC4_1 on Top Layer "NO_THERM_PLANE" (solid, remove dead copper, pour order 8): 13.75,13 17.25,13 17.25,14.5 16.25,15.5 13.75,15.5
NetC4_1 on Top Layer "NO_THERM_PLANE" (solid, remove dead copper, pour order 6): 7.25,5.75 13.75,5.75 17,9 17,12.25 11.5,12.25 7.25,8
JVCC on Top Layer "NO_THERM_PLANE" (solid, remove dead copper, pour order 0): 40.5,23.5 44.5,23.5 44.5,26 40.5,26
GND on Top Layer "NO_THERM_PLANE" (solid, remove dead copper, pour order 13): -4.011,0 ccw(c0,0) 2.299,-3.286 cw(c5.739,-8.203) 5.739,-2.203 25.661,-2.203 ccw(c25.661,3.797) 30.418,0.141 cw(c80.365,-38.256) 45.54,14.244 115.189,14.244 cw(c80.365,-38.256) 130.312,0.141 ccw(c135.069,3.797) 135.069,-2.203 154.991,-2.203 cw(c154.991,-8.203) 158.431,-3.286 ccw(c160.73,0) 164.74,0 164.74,3.178 ccw(c80.365,-38.256) 130.77,41.088 ccw(c128.089,36.867) 125.564,41.183 cw(c123.04,45.499) 118.064,45.004 ccw(c113.089,44.51) 114.927,49.16 ccw(c80.365,-38.256) 80.365,55.744 ccw(c80.365,-38.256) 45.802,49.16 ccw(c47.641,44.51) 42.665,45.004 cw(c37.69,45.499) 35.165,41.183 ccw(c32.641,36.867) 29.96,41.088 ccw(c80.365,-38.256) -4.011,3.178
NetC4_1 on Bottom Layer "NO_THERM_PLANE" (solid, remove dead copper, pour order 10): 13.75,15.5 16.5,15.5 17.25,14.75 17.25,9.5 13.75,9.5
GND on Bottom Layer "NO_THERM_PLANE" (solid, remove dead copper, pour order 4): 19.5,12.25 24.5,12.25 24.5,9.25 19.5,9.25
GND on Bottom Layer "NO_THERM_PLANE" (solid, remove dead copper, pour order 15): -4.011,0 ccw(c0,0) 2.299,-3.286 cw(c5.739,-8.203) 5.739,-2.203 25.661,-2.203 ccw(c25.661,3.797) 30.418,0.141 cw(c80.365,-38.256) 45.54,14.244 115.189,14.244 cw(c80.365,-38.256) 130.312,0.141 ccw(c135.069,3.797) 135.069,-2.203 154.991,-2.203 cw(c154.991,-8.203) 158.431,-3.286 ccw(c160.73,0) 164.74,0 164.74,3.178 ccw(c80.365,-38.256) 130.77,41.088 ccw(c128.089,36.867) 125.564,41.183 cw(c123.04,45.499) 118.064,45.004 ccw(c113.089,44.51) 114.927,49.16 ccw(c80.365,-38.256) 80.365,55.744 ccw(c80.365,-38.256) 45.802,49.16 ccw(c47.641,44.51) 42.665,45.004 cw(c37.69,45.499) 35.165,41.183 ccw(c32.641,36.867) 29.96,41.088 ccw(c80.365,-38.256) -4.011,3.178
GND on GND (split plane): 438 vertices, not listed, extent -3.5,-3.508 164.23,55.234
JVCC on VCC (split plane): 72.991,45.174 63.196,35.379 61.25,35.379 61.2,35.37 61.158,35.342 55.446,29.629 48.5,29.629 48.45,29.62 48.408,29.592 47.121,28.304 45.175,28.304 45.125,28.295 45.083,28.267 44.408,27.592 44.38,27.55 44.371,27.5 44.371,26.5 44.38,26.45 44.408,26.408 44.871,25.946 44.871,24.129 40.483,24.129 40.483,28.448 40.483,28.547 40.473,28.647 40.444,28.743 40.368,28.926 40.32,29.015 40.276,29.069 41.503,30.296 43.125,30.296 43.175,30.305 43.217,30.333 43.829,30.946 46.4,30.946 46.45,30.955 46.492,30.983 47.129,31.621 53,31.621 53.05,31.63 53.092,31.658 59.554,38.121 62.5,38.121 62.55,38.13 62.592,38.158 63.092,38.658 63.12,38.7 63.129,38.75 63.129,40.446 66.829,44.146 67.75,44.146 67.8,44.155 67.842,44.183 70.529,46.871 72.991,46.871
NetD32_1 on VCC (split plane): 63.658,20.658 63.7,20.63 63.75,20.621 70.121,20.621 70.121,17.879 61.541,17.879 61.519,17.95 61.387,18.269 61.371,18.299 61.34,18.357 61.149,18.644 61.117,18.682 61.085,18.721 60.841,18.965 60.803,18.996 60.764,19.028 60.477,19.22 60.42,19.25 60.389,19.267 60.071,19.399 59.975,19.428 59.637,19.495 59.537,19.505 59.192,19.505 59.093,19.495 58.755,19.428 58.659,19.399 58.341,19.267 58.31,19.25 58.252,19.22 57.966,19.028 57.927,18.996 57.888,18.965 57.645,18.721 57.613,18.682 57.581,18.644 57.39,18.357 57.359,18.299 57.342,18.269 57.21,17.95 57.197,17.906 57.181,17.854 57.114,17.516 57.105,17.427 57.104,17.417 57.104,17.244 57.104,17.072 57.105,17.062 57.114,16.972 57.181,16.634 57.197,16.583 57.21,16.539 57.342,16.22 57.359,16.189 57.39,16.132 57.581,15.845 57.613,15.807 57.645,15.768 57.888,15.524 57.927,15.492 57.966,15.461 58.252,15.269 58.31,15.238 58.341,15.222 58.659,15.09 58.704,15.077 58.755,15.061 59.093,14.994 59.173,14.986 59.192,14.984 59.322,14.984 59.322,14.755 50.379,14.755 50.379,18.446 53.804,21.871 62.446,21.871
3V3 on VCC (split plane): 485 vertices, not listed, extent -3.5,-3.508 164.23,55.234

## Keep-outs
Keep-Out Layer:
  circle w0.25: c108.365,31.322 r5.5
  circle w0.25: c125.758,21.448 r5.5
  circle w0.25: c139.922,7.328 r5.5
  circle w0.25: c0,0 r1.75
  circle w0.25: c160.73,0 r1.75
  circle w0.25: c101.365,17.244 r1.75
  circle w0.25: c59.365,17.244 r1.75
  circle w0.25: c61.865,43.744 r1.75
  circle w0.25: c98.865,43.744 r1.75
  lines w0.25: -4.011,0 ccw(c0,0) 2.299,-3.286 cw(c5.739,-8.203) 5.739,-2.203 25.661,-2.203 ccw(c25.661,3.797) 30.418,0.141 cw(c80.365,-38.256) 45.54,14.244 115.189,14.244 cw(c80.365,-38.256) 130.312,0.141 ccw(c135.069,3.797) 135.069,-2.203 154.991,-2.203 cw(c154.991,-8.203) 158.431,-3.286 ccw(c160.73,0) 164.74,0 164.74,3.178 ccw(c80.365,-38.256) 130.77,41.088 ccw(c128.089,36.867) 125.564,41.183 cw(c123.04,45.499) 118.064,45.004 ccw(c113.089,44.51) 114.927,49.16 ccw(c80.365,-38.256) 80.365,55.744 ccw(c80.365,-38.256) 45.802,49.16 ccw(c47.641,44.51) 42.665,45.004 cw(c37.69,45.499) 35.165,41.183 ccw(c32.641,36.867) 29.96,41.088 ccw(c80.365,-38.256) -4.011,3.178 -4.011,0 ; 21.972,14.448 ccw(c22.472,14.448) 22.472,13.948 39.472,13.948 ccw(c39.472,14.448) 39.972,14.448 39.972,28.448 ccw(c39.472,28.448) 39.472,28.948 29.972,28.948 21.972,20.948 21.972,14.448

## Other copper
Top Layer:
  pour cut-out: 158.68,4.32 158.68,2.68 162.986,2.68 162.986,4.32
  text "1" at 159,3 h1
Bottom Layer:
  pour cut-out: 158.68,4.32 158.68,2.68 162.986,2.68 162.986,4.32
  text "J. Andreae" at 117.35,20.6 h1
  text "J.P. Rey" at 117.35,19.1 h1
  text "V2.0  2017" at 117.35,17.35 h1
  text "4" at 162,3 h1
GND (plane layer: these items are gaps in the copper):
  text "2" at 160,3 h1
VCC (plane layer: these items are gaps in the copper):
  lines w0.254: 39.826,28.801 41.449,30.425 43.125,30.425 43.775,31.075 46.4,31.075 47.075,31.75 53,31.75 59.5,38.25 62.5,38.25 63,38.75 63,40.5 66.775,44.275 67.75,44.275 70.475,47 73.121,47 73.121,45.121 63.25,35.25 61.25,35.25 55.5,29.5 48.5,29.5 47.175,28.175 45.175,28.175 44.5,27.5 44.5,26.5 45,26 45,24 39.972,24 ; 50.25,14.244 50.25,18.5 53.75,22 62.5,22 63.75,20.75 70.25,20.75 70.25,17.75 61.052,17.75 ; 59.451,14.293 59.451,15.494
  text "3" at 161,3 h1

## Silkscreen, mask and mechanical layers (free items; w line width, h text height)
Bottom Overlay:
  lines w0.254: 46,28.5 50.75,28.5 ; 50.8,28.5 50.8,26.25 52,26.25 ; 52,26.25 51.5,25.75 51.5,26.75 52,26.25
Mechanical 1:
  circle w0.25: c92.365,31.744 r1.5
  circle w0.25: c92.365,26.244 r1.5
  circle w0.25: c46.972,21.448 r1.5
  circle w0.25: c46.972,26.948 r1.5
  circle w0.25: c46.972,32.448 r1.5
  circle w0.25: c92.365,38.744 r2.5
  circle w0.25: c68.365,38.744 r2.5
  circle w0.25: c68.365,23.744 r2.5
  circle w0.25: c116.971,43.963 r1.5
  circle w0.25: c108.176,47.339 r1.5
  circle w0.25: c99.077,49.778 r1.5
  circle w0.25: c89.772,51.251 r1.5
  circle w0.25: c80.365,51.744 r1.5
  circle w0.25: c70.957,51.251 r1.5
  circle w0.25: c61.653,49.778 r1.5
  circle w0.25: c52.553,47.339 r1.5
  circle w0.25: c43.759,43.961 r1.5
  circle w0.25: c125.365,39.687 r1.5
  circle w0.25: c133.266,34.554 r1.5
  circle w0.25: c140.587,28.627 r1.5
  circle w0.25: c147.248,21.964 r1.5
  circle w0.25: c153.176,14.643 r1.5
  circle w0.25: c158.307,6.744 r1.5
  circle w0.25: c35.365,39.685 r1.5
  circle w0.25: c27.464,34.554 r1.5
  circle w0.25: c20.143,28.625 r1.5
  circle w0.25: c13.482,21.962 r1.5
  circle w0.25: c7.553,14.643 r1.5
  circle w0.25: c2.423,6.742 r1.5
  circle w0.1: c80.365,33.244 r0.501
  circle w0.25: c108.365,31.322 r5.5
  circle w0.25: c125.758,21.448 r5.5
  circle w0.25: c139.922,7.328 r5.5
  circle w0.25: c0,0 r1.75
  circle w0.25: c160.73,0 r1.75
  circle w0.25: c101.365,17.244 r1.75
  circle w0.25: c59.365,17.244 r1.75
  circle w0.25: c61.865,43.744 r1.75
  circle w0.25: c98.865,43.744 r1.75
  lines w0.25: 21.972,14.448 ccw(c22.472,14.448) 22.472,13.948 39.472,13.948 ccw(c39.472,14.448) 39.972,14.448 39.972,28.448 ccw(c39.472,28.448) 39.472,28.948 29.972,28.948 21.972,20.948 21.972,14.448 ; 74.165,24.344 86.565,24.344 86.565,42.144 74.165,42.144 74.165,24.344
Mechanical 13:
  the board outline again, w0.25

## Text inside footprints (layer, text, board x,y; h text height)
C15: Bottom Overlay "+" at 30.85,6.725 h1.5 r270
J9: Bottom Overlay "2" at 66.37,17.202 h1.27 r180; Bottom Overlay "1" at 66.37,19.742 h1.27 r180; Bottom Overlay "19" at 93.294,19.742 h1.27 r180; Bottom Overlay "20" at 93.294,17.202 h1.27 r180